# Altium PCB pcb.PcbDoc (part 1 of 3)
Units mm, origin at the board's own origin, x right, y up, seen from the top; angles counter-clockwise.
Board outline 134 x 85 mm, 2 copper layers (Top Layer, Bottom Layer), stack 1.576 mm thick; 95 components, 38 nets, 258 pads, 1810 vias.
Unrouted connection lines stored in the file: 41.
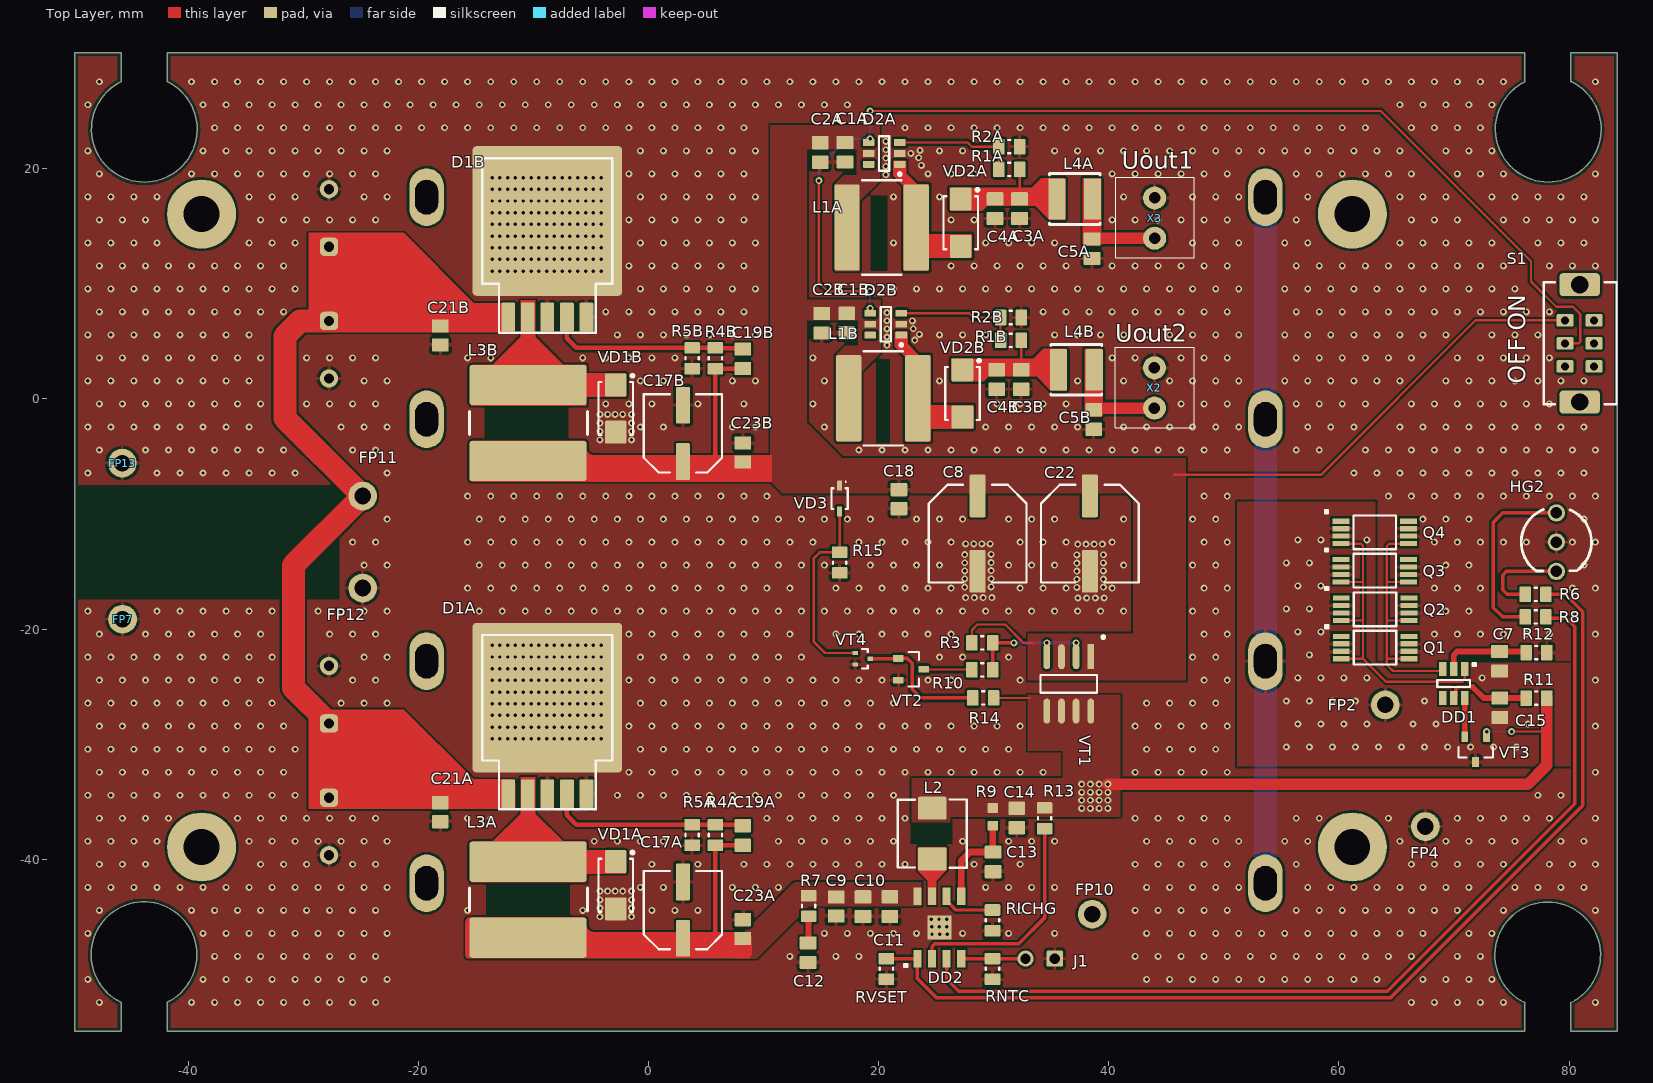
[diagram p0: Top Layer view]
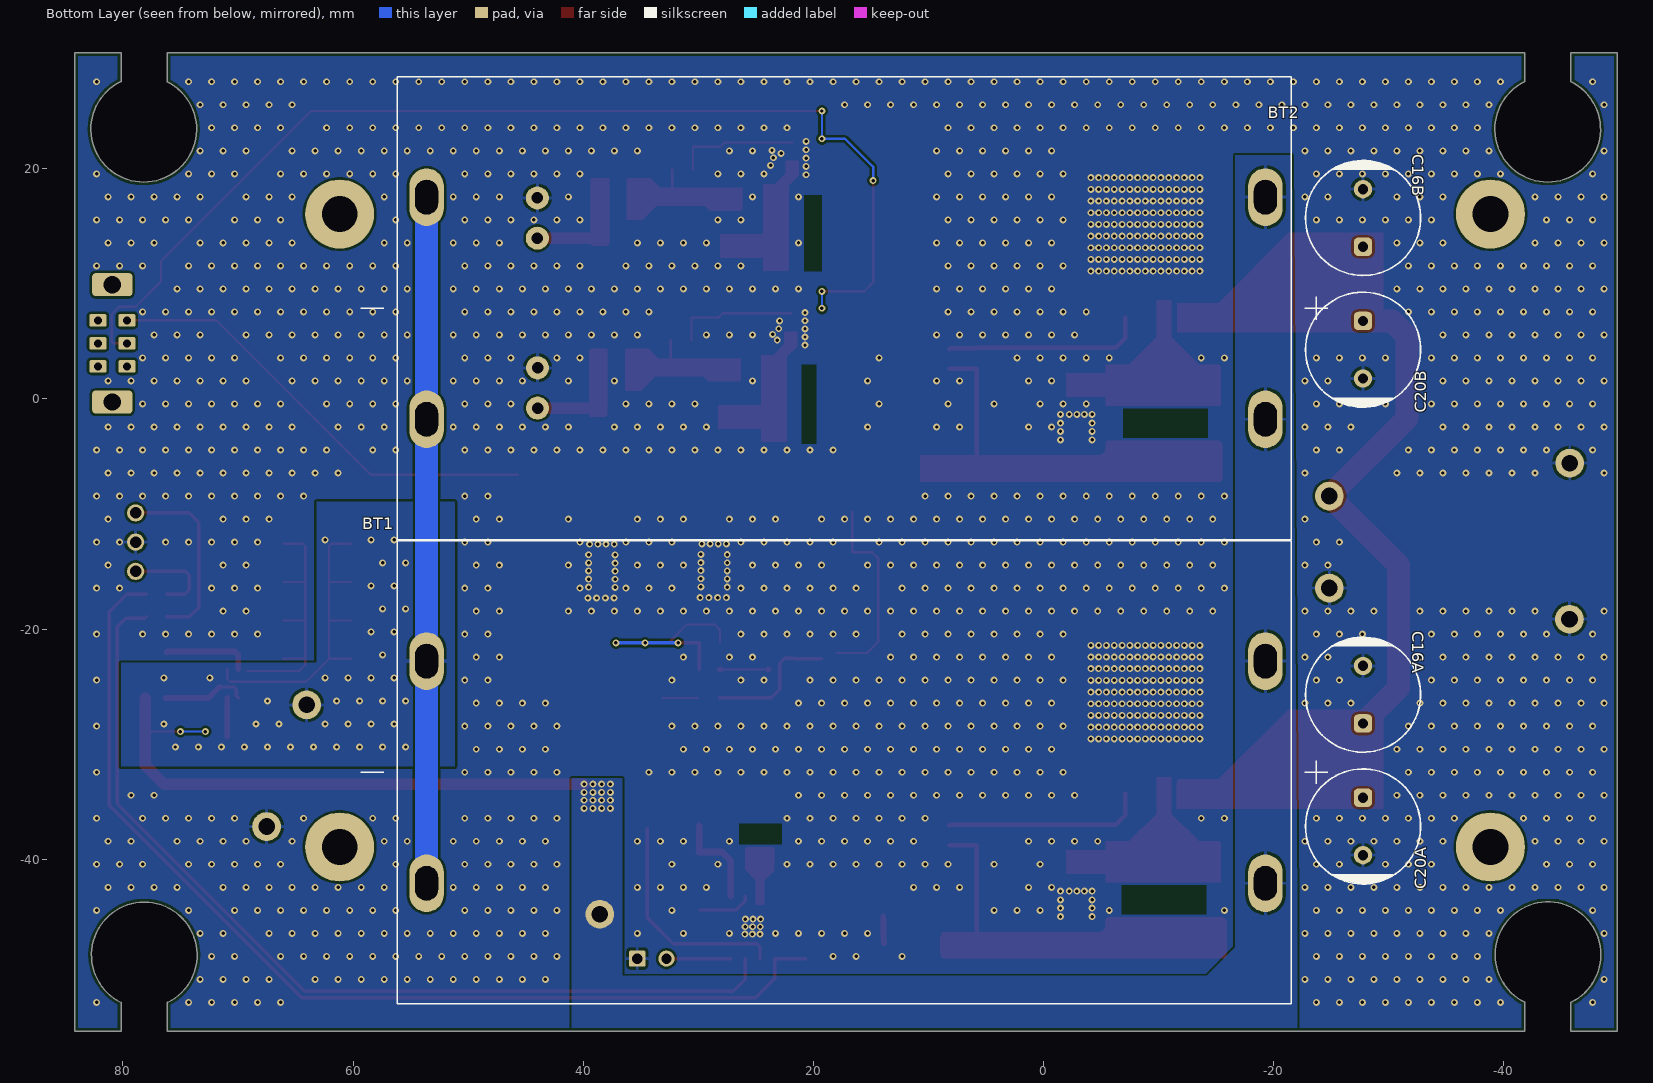
[diagram p1: Bottom Layer view, seen from below]
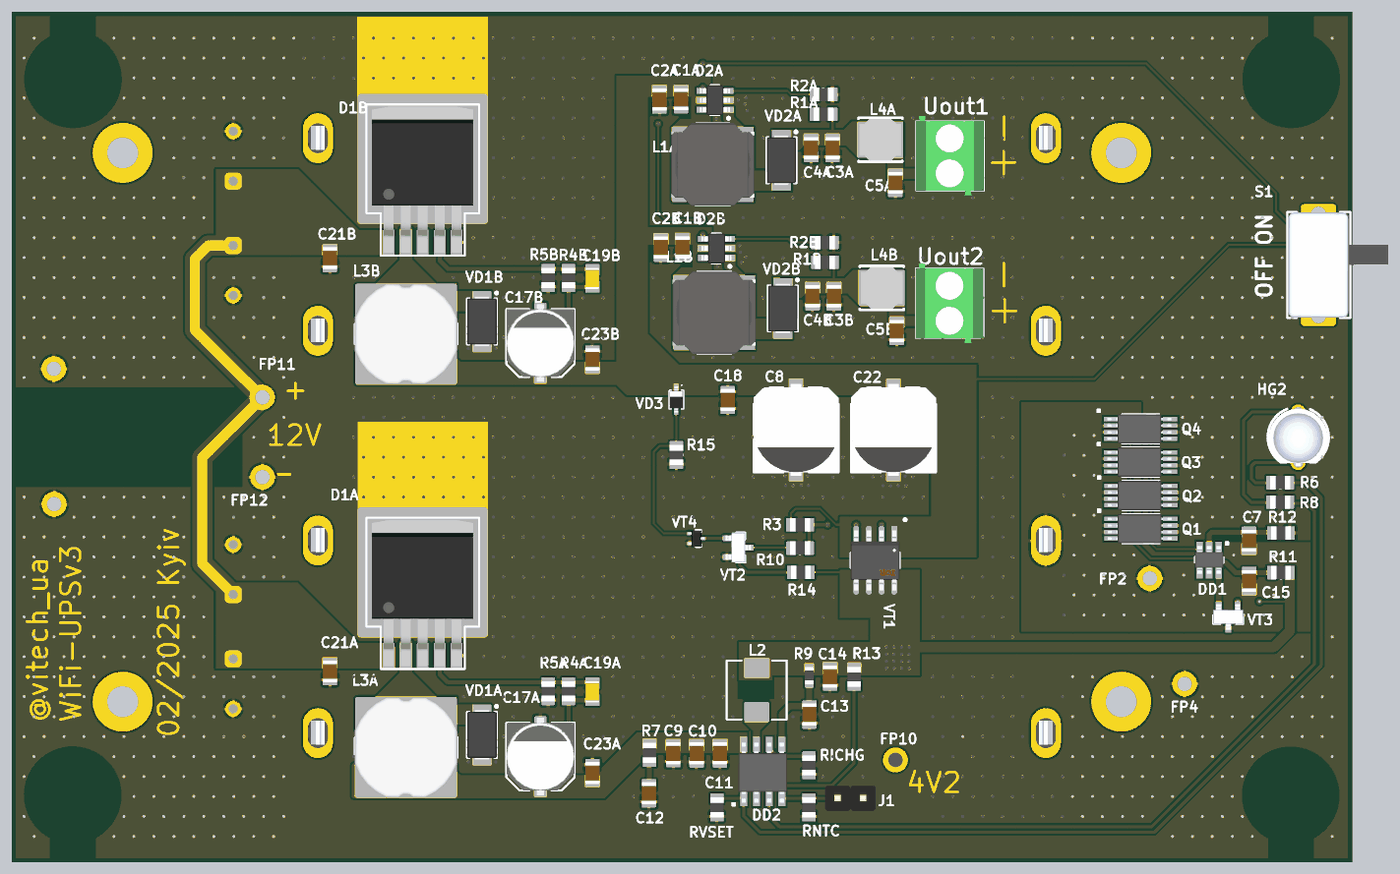
[diagram p3: 3D render of the assembled board from above, using the file's embedded part models]
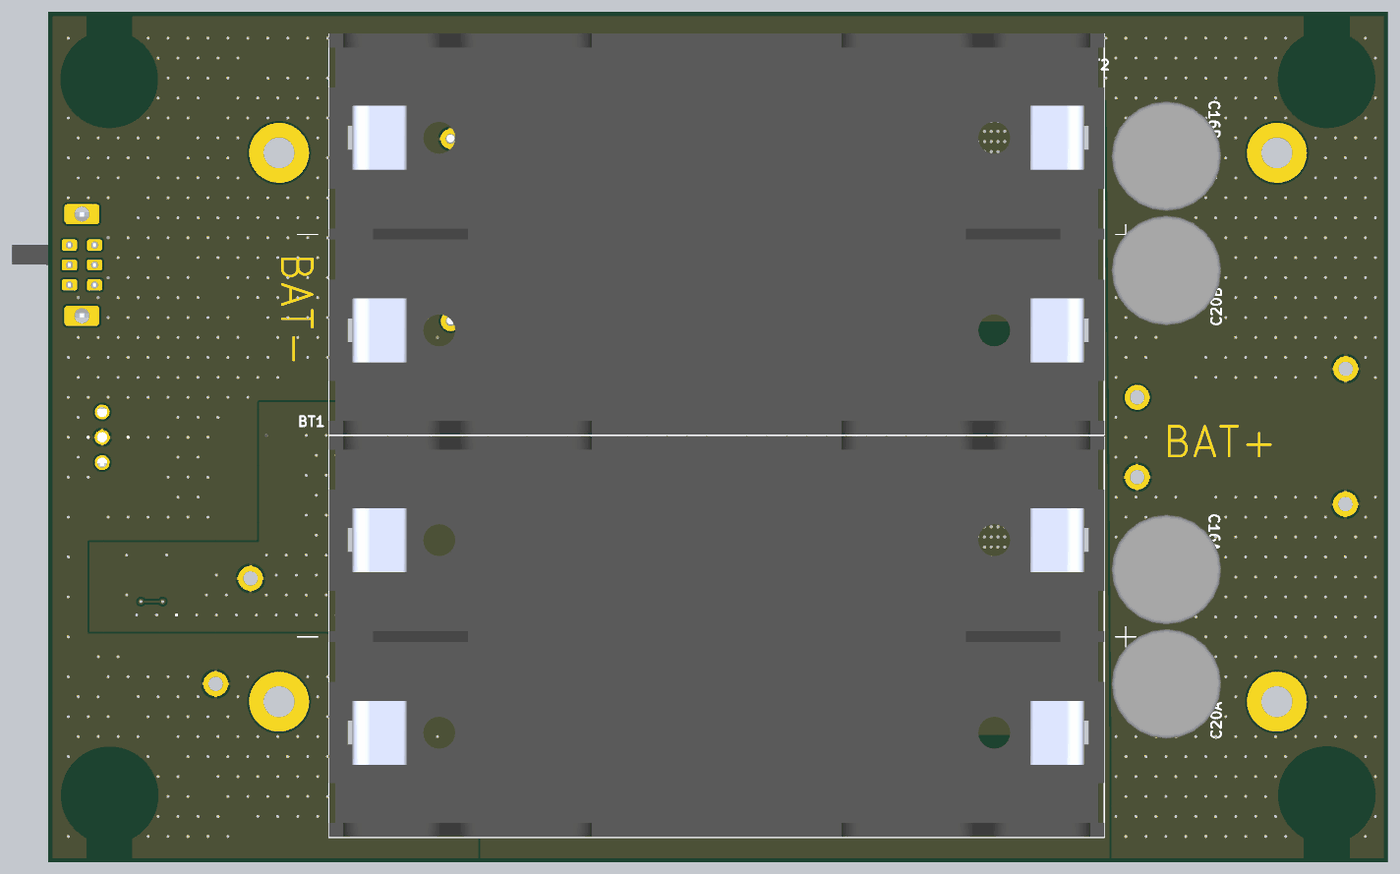
[diagram p4: 3D render of the assembled board from below, using the file's embedded part models]

## Layer stack, top to bottom
Top Solder: solder mask 0.012, Solder Resist, Dk 3.5
Top Layer: signal copper 0.038
Dielectric 1: dielectric 1.5, FR-4, Dk 4.8
Bottom Layer: signal copper 0.038
Bottom Solder: solder mask 0.012, Solder Resist, Dk 3.5

## Board outline
-49.835,-54.94 -45.835,-54.94 -45.835,-52.44 cw(c-43.835,-48.304) -41.835,-52.44 -41.835,-54.94 76.165,-54.94 76.165,-52.44 76.116,-52.451 cw(c78.141,-48.327) 80.165,-52.451 80.165,-54.94 84.165,-54.94 84.165,30.06 80.165,30.06 80.165,27.559 80.215,27.559 cw(c78.19,23.435) 76.165,27.559 76.165,30.06 -41.835,30.06 -41.835,27.559 -41.786,27.559 cw(c-43.81,23.435) -45.835,27.559 -45.835,30.06 -49.835,30.06

## Design rules (kind name [scope] priority, off if disabled: settings)
BoardOutlineClearance [All] p1: gap=0.3 ignorepadtopadclearanceinfootprint=FALSE except(0: Track-OutlineEdge)
Clearance MiddleVoltage [InNetClass('MiddleVoltage')] p1: gap=0.5 ignorepadtopadclearanceinfootprint=FALSE except(0: Arc-Hole Track-Hole SMDPad-Hole THPad-Hole Via-Hole Fill-Hole Poly-Hole Region-Hole Text-Hole; 0.2: Arc-Text Track-Text SMDPad-Text THPad-Text Via-Text Fill-Text Poly-Text Region-Text Text-Text)
Clearance HighVoltage [InNetClass('HighVoltage')] p2: gap=1 ignorepadtopadclearanceinfootprint=FALSE except(0: Arc-Hole Track-Hole SMDPad-Hole THPad-Hole Via-Hole Fill-Hole Poly-Hole Region-Hole Text-Hole; 0.2: Arc-Text Track-Text SMDPad-Text THPad-Text Via-Text Fill-Text Poly-Text Region-Text Text-Text)
Clearance Standart [All] p3: gap=0.2 ignorepadtopadclearanceinfootprint=FALSE except(0: Arc-Hole Track-Hole SMDPad-Hole THPad-Hole Via-Hole Fill-Hole Poly-Hole Region-Hole Text-Hole)
ComponentClearance [All] p1: gap=0.1 collisioncheckmode=3 verticalgap=0.1 showdistances=TRUE
Height [All] p1: minheight=0 maxheight=40 prefheight=12.7
HoleSize [All] p1: absolutevalues=TRUE maxlimit=12 minlimit=0.3 maxpercent=80.000 minpercent=20.000
HoleToHoleClearance [All] p1: gap=0.3 allowstackedmicrovias=TRUE
MinimumSolderMaskSliver [All] p1: minsoldermaskwidth=0.1
NetAntennae [All] p1: netantennaetolerance=2
PlaneClearance [All] p1: clearance=0.3
PlaneConnect PlaneConnectMiddleCurrent [InNetClass('MiddleCurrent')] p1: planeconnectstyle=Relief reliefexpansion=0.508 reliefentries=4 reliefconductorwidth=0.5 reliefairgap=0.3
PlaneConnect PlaneHighCurrent [InNetClass('HighCurrent')] p2: planeconnectstyle=Relief reliefexpansion=0.508 reliefentries=4 reliefconductorwidth=0.5 reliefairgap=0.35
PlaneConnect [All] p3: planeconnectstyle=Relief reliefexpansion=0.508 reliefentries=4 reliefconductorwidth=0.3 reliefairgap=0.3
PolygonConnect PolygonConnectMiddleCurrent [All vs InNetClass('MiddleCurrent')] p1: connectstyle=Relief reliefconductorwidth=0.4 reliefentries=4 polygonreliefangle="90 Angle" airgapwidth=0.3
PolygonConnect PolygonHighCurrent [InNetClass('HighCurrent')] p2: connectstyle=Relief reliefconductorwidth=0.5 reliefentries=4 polygonreliefangle="90 Angle" airgapwidth=0.3
PolygonConnect PolygonConnect_Keepout [(ObjectKind = 'Track') And (Layer = 'KeepOutLayer')] p3: connectstyle=Direct reliefconductorwidth=0.254 reliefentries=4 polygonreliefangle="90 Angle" airgapwidth=0.254
PolygonConnect PolygonConnect_Via [IsVia] p4: connectstyle=Direct reliefconductorwidth=0.254 reliefentries=4 polygonreliefangle="90 Angle" airgapwidth=0.254
PolygonConnect [All] p5: thpad.connectstyle=Relief thpad.reliefconductorwidth=0.3 thpad.reliefentries=4 thpad.polygonreliefangle="90 Angle" thpad.airgapwidth=0.25 smdpad.connectstyle=Relief smdpad.reliefconductorwidth=0.3 smdpad.reliefentries=4 smdpad.polygonreliefangle="90 Angle" smdpad.airgapwidth=0.25 via.connectstyle=Direct via.reliefconductorwidth=0.3 via.reliefentries=4 via.polygonreliefangle="90 Angle" via.airgapwidth=0.3
RoomDefinition STEP_UPA [InComponentClass('STEP_UPA')] p1: confinementstyle=ConfineIn formatcopy=TRUE lockcomponents=FALSE outline 13.703,9.003 40.271,9.003 40.271,23.709 13.703,23.709
RoomDefinition SDB [InComponentClass('SDB')] p2: confinementstyle=ConfineIn formatcopy=TRUE lockcomponents=FALSE outline -33.909,-7.671 9.271,-7.671 9.271,21.819 -33.909,21.819
RoomDefinition SDA [InComponentClass('SDA')] p3: confinementstyle=ConfineIn formatcopy=TRUE lockcomponents=FALSE outline -33.909,-49.098 9.271,-49.098 9.271,-19.609 -33.909,-19.609
RoomDefinition COMUTATOR [InComponentClass('COMUTATOR')] p4: confinementstyle=ConfineIn formatcopy=TRUE lockcomponents=FALSE outline 11.829,-30.175 46.176,-30.175 46.176,-6.02 11.829,-6.02
RoomDefinition STEP_UPB [InComponentClass('STEP_UPB')] p5: confinementstyle=ConfineIn formatcopy=TRUE lockcomponents=FALSE outline 13.843,-5.842 40.411,-5.842 40.411,8.865 13.843,8.865
RoomDefinition charger [InComponentClass('charger')] p6: confinementstyle=ConfineIn formatcopy=TRUE lockcomponents=FALSE outline -887.727,-833.82 -836.927,-833.82 -836.927,-808.42 -887.727,-808.42
RoutingCorners [All] p1: cornerstyle=45-Degree minsetback=1 maxsetback=3
RoutingVias Power [InNetClass('Power')] p1: holewidth=0.8 width=1.5 viastyle="Through Hole" minholewidth=0.5 minwidth=1 maxholewidth=1.2 maxwidth=3
RoutingVias [All] p2: holewidth=0.4 width=0.8 viastyle="Through Hole" minholewidth=0.3 minwidth=0.6 maxholewidth=1 maxwidth=2
SilkToSilkClearance [All] p1: silktosilkclearance=0
SilkToSolderMaskClearance [IsPad] p1: minsilkscreentomaskgap=0.05 clearancetoexposedcopper=TRUE
SolderMaskExpansion SolderMaskExpansion_VIA [IsVia] p1: expansion=-3 istentingtop=TRUE useseparateexpansions=TRUE expansionbottom=-3 istentingbottom=TRUE
SolderMaskExpansion [All] p2: expansion=0.05 istentingtop=FALSE
SupplyNets "Schematic Supply Nets" [InNet('STEP_UP_IN')] p1: voltage=0.000
SupplyNets "Schematic Supply Nets_4" [InNet('GND')] p2: voltage=0.000
SupplyNets "Schematic Supply Nets_5" [InNet('+4V2_BAT')] p3: voltage=0.000
SupplyNets "Schematic Supply Nets_3" [InNet('BGND')] p4: voltage=0.000
SupplyNets "Schematic Supply Nets_2" [InNet('12V_EXT')] p5: voltage=0.000
Width Width_ANT [InNetClass('Anthenna')] p1: maxlimit=1.641 minlimit=0.2 preferedwidth=1.641
Width WidthMiddleCurrent [InNetClass('MiddleCurrent')] p2: maxlimit=2 minlimit=0.35 preferedwidth=0.5
Width WidthHighCurrent [InNetClass('HighCurrent')] p3: maxlimit=5 minlimit=0.5 preferedwidth=1
Width [All] p4: maxlimit=2 minlimit=0.2 preferedwidth=0.5
19 further rules are at their usual default settings.

## Classes and differential pairs
channel class STEP-UP: STEP_UPA STEP_UPB
component class Designator: FP7 FP11 FP12 FP13
component class pROTECTOR: BT1 BT2 C7 C15 DD1 FP2 FP4 Q1 Q2 Q3 Q4 R11 R12 VT3
component class STEP_UPB: C1B C2B C3B C4B C5B D2B L1B L4B R1B R2B VD2B
component class STEP_UPA: C1A C2A C3A C4A C5A D2A L1A L4A R1A R2A VD2A
component class SDA: C16A C17A C19A C20A C21A C23A D1A L3A R4A R5A VD1A
channel class StepDown_LM2596: SDA SDB
component class main: S1 X2 X3
component class charger: C9 C10 C11 C12 C13 C14 DD2 FP10 HG2 J1 L2 R6 R7 R8 R9 R13 RICHG RNTC RVSET
component class SDB: C16B C17B C19B C20B C21B C23B D1B L3B R4B R5B VD1B
component class COMUTATOR: C8 C18 C22 R3 R10 R14 R15 VD3 VT1 VT2 VT4

## Components (designator, comment, footprint, x,y, rotation, side; value= is the part's Value field where it differs from the comment)
BT1 "18650 Holder 2pcs" BAT_BK-18650-PC4 17.315,-32.44 r0 bottom locked
BT2 "18650 Holder 2pcs" BAT_BK-18650-PC4 17.315,7.88 r0 bottom locked
C1A "22uF" CAP-0805(2012)X125T20 17.081,21.435 r270 top (schematic designator C1)
C1B "22uF" CAP-0805(2012)X125T20 17.221,6.59 r270 top (schematic designator C1)
C2A "0.1uF" CAP-0805(2012)X85T10 14.922,21.41 r270 top (schematic designator C2)
C2B "0.1uF" CAP-0805(2012)X85T10 15.062,6.565 r270 top (schematic designator C2)
C3A "0.1uF" CAP-0805(2012)X85T10 32.245,16.533 r270 top (schematic designator C3)
C3B "0.1uF" CAP-0805(2012)X85T10 32.385,1.688 r270 top (schematic designator C3)
C4A "22uF" CAP-0805(2012)X125T20 30.111,16.533 r270 top (schematic designator C4)
C4B "22uF" CAP-0805(2012)X125T20 30.251,1.688 r270 top (schematic designator C4)
C5A "0.1uF" CAP-0805(2012)X85T10 38.544,13.053 r270 top (schematic designator C5)
C5B "0.1uF" CAP-0805(2012)X85T10 38.684,-1.792 r270 top (schematic designator C5)
C7 "0.1uF" CAP-0805(2012)X85T10 73.96,-22.803 r90 top
C8 "470uFx6.3V" CAP-AE-830x670H30_MED 28.6,-11.709 r270 top value=470uF
C9 "0.1uF" C_CERAMIC_0805_MED 16.306,-44.12 r270 top
C10 "10uF" CAP-0805(2012)X85T10 18.643,-44.12 r270 top
C11 "22uF" CAP-0805(2012)X125T15 20.98,-44.12 r270 top
C12 "10uF" CAP-0805(2012)X125T15 13.868,-48.121 r270 top
C13 "22uF" CAP-0805(2012)X125T15 29.947,-40.234 r270 top
C14 "22uF" CAP-0805(2012)X125T15 32.004,-36.424 r270 top
C15 "0.1uF" CAP-0805(2012)X85T10 73.985,-26.842 r90 top
C16A "470uFx16V" CAP-AE-PTH-100D10x125H15 -27.762,-25.701 r90 bottom value=470uF (schematic designator C16)
C16B "470uFx16V" CAP-AE-PTH-100D10x125H15 -27.762,15.726 r90 bottom value=470uF (schematic designator C16)
C17A "220uFx6.3V" CAP-AE-660x550H20_MED 2.997,-44.425 r90 top value=220uF (schematic designator C17)
C17B "220uFx6.3V" CAP-AE-660x550H20_MED 2.997,-2.997 r90 top value=220uF (schematic designator C17)
C18 "0.1uF" C_CERAMIC_0805_MED 21.768,-8.712 r270 top
C19A "100pF" CAP-0805(2012)X60T10 8.204,-37.947 r270 top (schematic designator C19)
C19B "100pF" CAP-0805(2012)X60T10 8.204,3.481 r270 top (schematic designator C19)
C20A "470uFx16V" CAP-AE-PTH-100D10x125H15 -27.762,-37.153 r270 bottom value=470uF (schematic designator C20)
C20B "470uFx16V" CAP-AE-PTH-100D10x125H15 -27.762,4.274 r270 bottom value=470uF (schematic designator C20)
C21A "0.1uF" C_CERAMIC_0805_MED -18.085,-35.916 r270 top (schematic designator C21)
C21B "0.1uF" C_CERAMIC_0805_MED -18.085,5.512 r270 top (schematic designator C21)
C22 "470uFx6.3V" CAP-AE-830x670H30_MED 38.354,-11.709 r270 top value=470uF
C23A "0.1uF" C_CERAMIC_0805_MED 8.204,-46.076 r90 top (schematic designator C23)
C23B "0.1uF" C_CERAMIC_0805_MED 8.204,-4.648 r90 top (schematic designator C23)
D1A "LM2596S-ADJ" TO-263-5-1 -8.788,-34.316 r0 top (schematic designator D1)
D1B "LM2596S-ADJ" TO-263-5-1 -8.788,7.111 r0 top (schematic designator D1)
D2A "MT3608" MT3608_MED 20.485,21.333 r180 top (schematic designator D2)
D2B "MT3608" MT3608_MED 20.625,6.489 r180 top (schematic designator D2)
DD1 "DW01A-G" DW01A-G 69.972,-24.734 r270 top
DD2 "IP2312" IP2313 25.273,-45.923 r90 top
FP2 "PAD-1.45mm" PAD-1.45mm 64.028,-26.588 r0 top
FP4 "PAD-1.45mm" PAD-1.45mm 67.513,-37.16 r0 top
FP7 "PAD-1.45mm" PAD-1.45mm -45.7,-19.146 r0 top
FP10 "PAD-1.45mm" PAD-1.45mm 38.557,-44.78 r90 top
FP11 "PAD-1.45mm" PAD-1.45mm -24.835,-8.44 r90 top
FP12 "PAD-1.45mm" PAD-1.45mm -24.835,-16.44 r90 top
FP13 "PAD-1.45mm" PAD-1.45mm -45.725,-5.582 r0 top
HG2 "OSRPMC5B31A" OSRPMC5B31A 78.892,-12.446 r90 top
J1 "PLS-2 (Part of PLS-40)" PLS-2 34.036,-48.641 r180 top
L1A "4.7uH" SWPA8040S-Series 20.256,14.895 r0 top (schematic designator L1)
L1B "4.7uH" SWPA8040S-Series 20.396,0.051 r0 top (schematic designator L1)
L2 "2.2uH" BMRA00050530-Series 24.663,-37.77 r90 top
L3A "22uH" SRN1060-Series -10.465,-43.518 r270 top (schematic designator L3)
L3B "22uH" SRN1060-Series -10.465,-2.09 r270 top (schematic designator L3)
L4A "4.7uH" SRN4018-Series_1.8mm 37.045,17.371 r0 top (schematic designator L4)
L4B "4.7uH" SRN4018-Series_1.8mm 37.186,2.526 r0 top (schematic designator L4)
Q1 "FS8205A" FS8205A 63.139,-18.282 r0 top
Q2 "FS8205A" FS8205A 63.139,-21.61 r0 top
Q3 "FS8205A" FS8205A 63.114,-14.929 r0 top
Q4 "FS8205A" FS8205A 63.114,-11.602 r0 top
R1A "68k" R_ANY_CHIP_0805_MED 31.356,19.936 r180 top (schematic designator R1)
R1B "68k" R_ANY_CHIP_0805_MED 31.496,5.092 r180 top (schematic designator R1)
R2A "3.3k" R_ANY_CHIP_0805_MED 31.356,21.918 r0 top (schematic designator R2)
R2B "3.3k" R_ANY_CHIP_0805_MED 31.496,7.073 r0 top (schematic designator R2)
R3 "1k" R_ANY_CHIP_0805_MED 29.007,-21.209 r0 top
R4A "30k" R_ANY_CHIP_0805_MED 5.817,-37.897 r90 top (schematic designator R4)
R4B "30k" R_ANY_CHIP_0805_MED 5.817,3.531 r90 top (schematic designator R4)
R5A "10k" R_ANY_CHIP_0805_MED 3.785,-37.897 r270 top (schematic designator R5)
R5B "10k" R_ANY_CHIP_0805_MED 3.785,3.531 r270 top (schematic designator R5)
R6 "2.2k" R_ANY_CHIP_0805_MED 77.089,-16.993 r0 top
R7 "2" R_ANY_CHIP_0805_MED 13.918,-44.07 r270 top
R8 "2.2k" R_ANY_CHIP_0805_MED 77.089,-18.948 r0 top
R9 "0.51" R_ANY_CHIP_0603_MED 29.921,-36.322 r270 top
R10 "22" R_ANY_CHIP_0805_MED 29.007,-23.546 r180 top
R11 "100" R_ANY_CHIP_0805_MED 77.16,-26.004 r0 top
R12 "1k" R_ANY_CHIP_0805_MED 77.16,-22.041 r180 top
R13 "1k" R_ANY_CHIP_0805_MED 34.417,-36.449 r90 top
R14 "1k" R_ANY_CHIP_0805_MED 29.083,-25.984 r180 top
R15 "1k" R_ANY_CHIP_0805_MED 16.612,-14.224 r270 top
RICHG "NC" R_ANY_CHIP_0805_MED 29.897,-45.314 r90 top
RNTC "53k" R_ANY_CHIP_0805_MED 29.897,-49.53 r90 top
RVSET "NC" R_ANY_CHIP_0805_MED 20.676,-49.53 r90 top
S1 "SK22N13U02-2000" SK22N13U02-2000 80.919,4.826 r90 top
VD1A "SK56A-LTP" SMA_MED -2.845,-42.266 r270 top (schematic designator VD1)
VD1B "SK56A-LTP" SMA_MED -2.845,-0.838 r270 top (schematic designator VD1)
VD2A "SK56A-LTP" SMA_MED 27.139,15.314 r270 top (schematic designator VD2)
VD2B "SK56A-LTP" SMA_MED 27.28,0.469 r270 top (schematic designator VD2)
VD3 "BZX384-A4V7-QX" SOD-323_MED 16.612,-8.661 r270 top
VT1 "IRF9358PBF" FP-PG-DSO-8-IPC_B 36.525,-24.765 r270 top
VT2 "IRLML6344" SOT-23_MED 22.809,-23.495 r180 top
VT3 "2N7002,215" SOT-23_MED 71.882,-30.455 r90 top
VT4 "DTC143ZET1G" SOT-416 18.618,-22.581 r270 top
X2 "DG350-3.5-02P" DG350-3.5-02P-14-00AH 43.967,1.041 r90 top
X3 "DG350-3.5-02P" DG350-3.5-02P-14-00AH 43.985,15.805 r90 top

## Footprints (in the part's own frame and the unit in brackets; to place one, negate y for a bottom-side part, rotate by r counter-clockwise, add the part's x,y. Pads: shape width x height; smd on the part's side, far side on the other; paste and mask are expansions set on the pad)
BAT_BK-18650-PC4 [mm]
  oval 3x5 hole 2 slot 3 at 90 deg: 1+(-36.6,9.65) 1-(36.3,9.65) 2+(-36.6,-9.65) 2-(36.3,-9.65)
  silkscreen extent -42,-20.11 42,20.11, body extent -38.86,-20.14 38.84,20.07, height 22.5
BMRA00050530-Series [mm] "5.4x5.7x2.8mm Shielded Power Inductor"
  rrect15% 2x2.5 smd mask+0.05: 1(-2.2,0) 2(2.2,0)
  silkscreen extent -2.96,-3 2.96,3, body extent -2.95,-2.88 2.95,2.88, height 3
C_CERAMIC_0805_MED [mm] "Chip Capacitor, 2-Leads, Body 2,00x1,25mm, IPC Medium Density"
  rrect15% 1.15x1.45 smd mask+0.05: 1(-0.825,0) 2(0.825,0)
  Top Layer pour cut-out: -0.05,0.65 0.05,0.65 0.05,-0.65 -0.05,-0.65
  body extent -1.1,-0.72 1.1,0.73, height 1.35
CAP-0805(2012)X60T10 [mm] "Chip Capacitor, 2-Leads, Body 2,00x1,25mm, IPC Medium Density"
  rrect15% 1.15x1.45 smd mask+0.05: 1(-0.85,0) 2(0.85,0)
  Top Layer pour cut-out: -0.05,0.651 0.05,0.651 0.05,-0.649 -0.05,-0.649
  body extent -1.07,-0.7 1.08,0.7, height 0.7
CAP-0805(2012)X85T10 [mm] "Chip Capacitor, 2-Leads, Body 2,00x1,25mm, IPC Medium Density"
  rrect15% 1.15x1.45 smd mask+0.05: 1(-0.85,0) 2(0.85,0)
  Top Layer pour cut-out: -0.05,0.651 0.05,0.651 0.05,-0.649 -0.05,-0.649
  body extent -1.1,-0.72 1.1,0.73, height 0.95
CAP-0805(2012)X125T15 [mm] "Chip Capacitor, 2-Leads, Body 2,00x1,25mm, IPC Medium Density"
  rrect15% 1.15x1.45 smd mask+0.05: 1(-0.85,0) 2(0.85,0)
  Top Layer pour cut-out: -0.05,0.651 0.05,0.651 0.05,-0.649 -0.05,-0.649
  body extent -1.1,-0.72 1.1,0.73, height 1.4
CAP-0805(2012)X125T20 [mm] "Chip Capacitor, 2-Leads, Body 2,00x1,25mm, IPC Medium Density"
  rrect15% 1.15x1.45 smd mask+0.05: 1(-0.85,0) 2(0.85,0)
  Top Layer pour cut-out: -0.05,0.651 0.05,0.651 0.05,-0.649 -0.05,-0.649
  body extent -1.1,-0.72 1.1,0.73, height 1.45
CAP-AE-660x550H20_MED [mm] "Aluminum Electrolytic Capacitor, Body 6,60x6,60x5,50mm, IPC Medium Density"
  rrect15% 3.2x1.2 smd: 1(-2.45,0) 2(2.45,0)
  silkscreen extent -3.4,-3.4 3.4,3.4, body extent -3.9,-3.4 3.9,3.4, height 5.7
CAP-AE-830x670H30_MED [mm] "Aluminum Electrolytic Capacitor, Body 8.30x8.30x6.70mm, IPC Medium Density"
  rrect15% 3.7x1.4 smd: 1(-3.275,0) 2(3.275,0)
  silkscreen extent -4.25,-4.25 4.25,4.25, body extent -4.6,-4.25 4.6,4.25, height 7.2
CAP-AE-PTH-100D10x125H15 [mm] "PTH Aluminium Electrolytic Capacitor, Diameter 10mm, Height 12.5mm"
  rrect50% 1.6x1.6 hole 0.9: 1(-2.5,0)
  round 1.6 hole 0.9: 2(2.5,0)
  silkscreen extent -5,-5 5,5, body extent -5.5,-5.5 5.5,5.5, height 14
DG350-3.5-02P-14-00AH [mm] "Screw Terminal, Pitch 3,5 mm, 2-Pin, 300V, 7A, Green"
  round 2 hole 1: 1(-1.843,0) 2(1.657,0)
  silkscreen extent -3.54,-3.45 3.45,3.4, body extent -4.05,-3.4 3.95,3.4, height 8.4
DW01A-G [mm]
  rect 1.2x0.65 smd: 1(-1.25,0.95) 2(-1.25,0) 3(-1.25,-0.95) 4(1.25,-0.95) 5(1.25,0) 6(1.25,0.95)
  silkscreen extent -1.78,-1.43 0.3,1.9, body extent -1.4,-1.43 1.4,1.43, height 1.35
FP-PG-DSO-8-IPC_B [mm]
  rect 2.174x0.583 smd paste+0 mask+0: 1(-2.366,1.905)
  rrect100% 2.174x0.583 smd paste+0 mask+0: 2(-2.366,0.635) 3(-2.366,-0.635) 4(-2.366,-1.905) 5(2.366,-1.905) 6(2.366,-0.635) 7(2.366,0.635) 8(2.366,1.905)
  silkscreen extent -4.19,-2.45 0.78,3.12, body extent -3.7,-2.7 3.7,2.7, height 0.25
FS8205A [mm] "Dual N-Channel Enahncement Mode Power MOSFET"
  rect 1.475x0.45 smd: 1(-2.938,0.975) 2(-2.938,0.325) 3(-2.938,-0.325) 4(-2.938,-0.975) 5(2.938,-0.975) 6(2.938,-0.325) 7(2.938,0.325) 8(2.938,0.975)
  silkscreen extent -4.32,-1.47 1.85,1.93, body extent -3.33,-1.47 3.07,1.47, height 1.2
IP2313 [mm] "ESOP-8L DC-DC Converters RoHS"
  rect 1.525x0.7 smd: 1(-2.712,1.905) 2(-2.712,0.635) 3(-2.712,-0.635) 4(-2.712,-1.905) 5(2.712,-1.905) 6(2.712,-0.635) 7(2.712,0.635) 8(2.712,1.905)
  rect 2.083x2.083 smd: 9(0,0)
  silkscreen extent -3.43,2.79 -3.18,3.05, body extent -3.13,-2.45 2.87,2.45, height 1.65
MT3608_MED [mm] "SOT23, 6-Leads, Body 2,90x2,80mm, Pitch 0,95mm, IPC Medium Density"
  rrect15% 1x0.6 smd: 1(-1.35,0.95) 2(-1.35,0) 3(-1.35,-0.95) 4(1.35,-0.95) 5(1.35,0) 6(1.35,0.95)
  silkscreen extent -1.48,-1.5 0.45,1.92, body extent -1.5,-1.5 1.5,1.5, height 1.45
OSRPMC5B31A [mm]
  round 1.5 hole 1 mask+0.05: A1(-2.54,0) A2(2.54,0) CC(0,0)
  silkscreen extent -2.5,-3.05 2.84,3.05, body extent -2.87,-2.95 2.87,2.95, height 13.7
PAD-1.45mm [mm]
  round 2.5 hole 1.45: 1(0,0)
PLS-2 [mm] "2.54mm 2-pin solder pads"
  rrect15% 1.4x1.4 hole 0.9: 1(-1.27,0)
  round 1.4 hole 0.9: 2(1.27,0)
  body extent -2.54,-1.3 2.54,1.24, height 8.54
R_ANY_CHIP_0603_MED [mm] "Chip Resistor, 2-Leads, Body 1,60x0,80mm, IPC Medium Density"
  rrect15% 0.85x0.9 smd mask+0.05: 1(-0.775,0) 2(0.775,0)
  body extent -0.85,-0.45 0.85,0.45, height 0.55
R_ANY_CHIP_0805_MED [mm] "Chip Resistor, 2-Leads, Body 2,00x1,25mm, IPC Medium Density"
  rrect15% 1x1.35 smd: 1(-0.9,0) 2(0.9,0)
  silkscreen extent -0.1,-0.58 0.1,0.57, body extent -1,-0.67 1,0.68, height 0.6
SK22N13U02-2000 [mm]
  rrect30% 1.1x1.5 hole 0.7: 1(-2,-1.25) 2(0,-1.25) 3(2,-1.25) 4(2,1.27) 5(0,1.27) 6(-2,1.27)
  rrect30% 2x3.5 hole 1.5: 7(-5.1,0) 7(5.1,0)
  silkscreen extent -5.3,-3.2 5.3,3.13, body extent -5.25,-7 5.25,3, height 5
SMA_MED [mm] "Molded Diode, 2-Leads, Body 4,30x2,61mm, IPC Medium Density"
  rrect15% 2x1.9 smd mask+0.05: AN(2.05,0) CA(-2.05,0)
  silkscreen extent -2.97,-1.5 2.3,1.58, body extent -2.52,-1.46 2.52,1.46, height 2.44
SOD-323_MED [mm] "SOD-323, 2-Leads, Body 1,25x2,50mm, IPC Medium Density"
  rrect15% 0.85x0.45 smd paste+0 mask+0.05: AN(1.125,0) CA(-1.125,0)
  silkscreen extent -1.5,-0.7 0.9,0.7, body extent -1.3,-0.67 1.3,0.68, height 1.1
SOT-23_MED [mm] "SOT23, 3-Leads, Body 2,92x2,37mm, Pitch 0,95mm, IPC Medium Density"
  rrect15% 0.9x0.6 smd mask+0.05: 1(1.1,-0.95) 2(1.1,0.95) 3(-1.1,0)
  silkscreen extent -0.7,-1.5 0.2,1.5, body extent -1.27,-1.5 1.28,1.5, height 1.15
SOT-416 [mm]
  rrect15% 0.35x0.5 smd mask+0.05: 1(-0.5,-0.65) 2(0.5,-0.65) 3(0,0.65)
  silkscreen extent -0.85,-0.05 0.85,0.45, body extent -0.8,-0.8 0.8,0.8, height 0.78
SRN1060-Series [mm] "SMD Inductor, SRN Series"
  rrect15% 3.5x10.2 smd: 1(-3.3,0) 2(3.3,0)
  silkscreen extent -1,-5.1 1,5.15, body extent -5.05,-5.15 5.05,5.15, height 6
SRN4018-Series_1.8mm [mm] "Semi-shielded Power Inductors, 4.0x4.0x1.8mm"
  rrect15% 1.5x3.6 smd mask+0.05: 1(-1.55,0) 2(1.55,0)
  silkscreen extent -2.2,-2.2 2.2,2.2, body extent -2.1,-2.1 2.1,2.1, height 1.8
SWPA8040S-Series [mm] "Power Wire Wound Inductor, 2-Leads, Body 8,00x8,00mm, IPC Medium Density"
  rrect15% 2.2x7.5 smd: 1(-3,0) 2(3,0)
  silkscreen extent -1.7,-4.1 1.7,4.1, body extent -4.15,-4.15 4.15,4.15, height 4.2
TO-263-5-1 [mm]
  rrect15% 1.2x2.5 smd mask+0.05: 1(-3.4,0) 2(-1.7,0) 3(0,0) 4(1.7,0) 5(3.4,0)
  rrect5% 13x13 smd mask+0.05: 6(0,8.35)
  silkscreen extent -5.65,-1.35 5.65,13.8, body extent -5.08,-1.07 5.08,13.57, height 4.57

## Part data
BT1 BT2: "Battery Holder (Open) 18650 2 Cell PC Pin", Package=None, Availability=Unavailable, MP=BK-18650-PC4, Price=None
C1A C1B C4A C4B: library part CL21A226MAYNNNE, "22uF 25V X5R ±20% 0805 Ceramic Capacitor RoHS", Dielectric Type=X5R, Manufacturer="Samsung Electro-Mechanics", Package=0805, Supplier Part Number 1=187-CL21A226MAYNNNE, Temperature Range="-55°C ~ 85°C", Tolerance=±20%, Voltage=25V, Ajax_1C_ID=35089, Ajax_1C_PN="22uF 25V X5R 20% 0805 CL21A226MAYNNNE Ceramic Capacitor SMD RoHS", Ajax_1С_Status="Mass Production", Component Status=Released, Component Type=SMD, ComponentLink1Description=Datasheet, ComponentLink1URL=https://eu.mouser.com/datasheet/2/585/MLCC-1837944.pdf, GUID_1C=e78293ef-273d-11ec-ab76-0050569f2651, Part Number=CL21A226MAYNNNE, Part Type="Ceramic / X5R / 0805", Price=0.02, Replacement=NONE, Standard Lead Time="24 Weeks", Supplier 1=Mouser
C2A C2B C3A C3B C5A C5B C7 C15: library part CL21B104KBCNNNC, "100nF 50V X7R ±10% 0805 Ceramic Capacitor RoHS", Dielectric Type=X7R, Manufacturer="Samsung Electro-Mechanics", Package=0805, Supplier Part Number 1=1276-1003-2-ND, Temperature Range="-55°C ~ 125°C", Tolerance=±10%, Voltage=50V, Ajax_1C_ID=1251, Ajax_1C_PN="100nF 50V X7R 10% 0805 CL21B104KBCNNNC Ceramic Capacitor SMD RoHS", Ajax_1С_Status="Mass Production", Component Status=Released, Component Type=SMD, ComponentLink1Description=Datasheet, ComponentLink1URL=https://media.digikey.com/pdf/Data%20Sheets/Samsung%20PDFs/CL_Series_MLCC_ds.pdf, GUID_1C=2c368b99-dd41-11e0-af93-6c626deda1bb, Part Number=CL21B104KBCNNNC, Part Type="Ceramic / X7R / 0805", Price=0,00700031, Replacement=NONE, Standard Lead Time="22 Weeks", Supplier 1=Digi-Key
C8 C22: library part RHA0J471MCN1GS, "470uF 6.3V ±20% Size D D8x6.7mm SMD Low ESR Aluminum Electrolytic Capacitor, 9mOhm, 4.5A Ripple Current, 2000 Hrs @ 105°C", Dielectric Type=NONE, Manufacturer=Nichicon, Package="Size D D8x6.7mm", Supplier Part Number 1=647-RHA0J471MCN1GS, Temperature Range="-55°C ~ 105°C", Tolerance=±20%, Voltage=6.3V, Ajax_1C_ID=47814, Ajax_1C_PN="470uF 6.3V 20% 8x7.6mm RHA0J471MCN1GS Nichicon Aluminium Capacitors", Ajax_1С_Status="Mass Production", Component Status=Released, Component Type=SMD, ComponentLink1Description=Datasheet, ComponentLink1URL=https://eu.mouser.com/datasheet/2/293/e_rhs_rha-2507346.pdf, GUID_1C=ebb9074e-17d1-11ed-a362-005056994834, Part Number=RHA0J471MCN1GS, Part Type=Aluminum, Price=0,23717112, Replacement=NONE, Standard Lead Time="17 Weeks", Supplier 1=Mouser
C9 C18 C21A C21B C23A C23B: library part CL21B104KCFSFNE, "100nF 100V X7R ±10% 0805 Ceramic Capacitor RoHS", Dielectric Type=X7R, Manufacturer="Samsung Electro-Mechanics", Package=0805, Supplier Part Number 1=1276-2923-2-ND, Temperature Range="-55°C ~ 125°C", Tolerance=±10%, Voltage=100V, Ajax_1C_ID=12279, Ajax_1C_PN="100nF 100V X7R 10% 0805 CL21B104KCFSFNE Ceramic Capacitor SMD RoHS", Ajax_1С_Status="Mass Production", Component Status=Released, Component Type=SMD, ComponentLink1Description=Datasheet, ComponentLink1URL=https://media.digikey.com/pdf/Data%20Sheets/Samsung%20PDFs/CL_Series_MLCC_ds.pdf, GUID_1C=e54cb00c-325f-11e8-822c-14dda9d2d04d, Part Number=CL21B104KCFSFNE, Part Type="Ceramic / X7R / 0805", Price=0,0054, Replacement=NONE, Standard Lead Time="22 Weeks", Supplier 1=Digi-Key
C10: library part C2012X5R1E106M085AC, "10uF 25V X5R ±20% 0805 Ceramic Capacitor RoHS", Dielectric Type=X5R, Manufacturer="TDK Corporation", Package=0805, Supplier Part Number 1=445-14388-1-ND, Temperature Range="-55°C ~ 85°C", Tolerance=±20%, Voltage=25V, Ajax_1C_ID=13798, Ajax_1C_PN="10uF 25V X5R 20% 0805 C2012X5R1E106M085AC Ceramic Capacitor SMD RoHS", Ajax_1С_Status="Mass Production", Component Status=Released, Component Type=SMD, ComponentLink1Description=Datasheet, ComponentLink1URL=https://product.tdk.com/info/en/catalog/datasheets/mlcc_commercial_general_en.pdf, GUID_1C=d6f4b954-ba78-11e8-ab45-005056918265, Part Number=C2012X5R1E106M085AC, Part Type="Ceramic / X5R / 0805", Price=0,2673, Replacement=NONE, Standard Lead Time="12 Weeks", Supplier 1=Digi-Key
C11 C13 C14: library part CL21A226MAQNNNE, "22uF 25V X5R ±20% 0805 Ceramic Capacitor RoHS", Dielectric Type=X5R, Manufacturer="Samsung Electro-Mechanics", Package=0805, Supplier Part Number 1=187-CL21A226MAQNNNE, Temperature Range="-55°C ~ 85°C", Tolerance=±20%, Voltage=25V, Ajax_1C_ID=23499, Ajax_1C_PN="22uF 25V X5R 20% 0805 CL21A226MAQNNNE Samsung Ceramic Capacitor SMD RoHS", Ajax_1С_Status="Mass Production", Component Status=Released, Component Type=SMD, ComponentLink1Description=Datasheet, ComponentLink1URL=https://eu.mouser.com/datasheet/2/585/MLCC-1837944.pdf, GUID_1C=5446b6ba-1abc-11eb-ab6d-0050569f2651, Part Number=CL21A226MAQNNNE, Part Type="Ceramic / X5R / 0805", Price=0,038, Replacement=NONE, Standard Lead Time="20 Weeks", Supplier 1=Mouser
C12: library part CL21A106KOQNNNE, "10uF 16V Х5R ±10% 0805 Ceramic Capacitor RoHS", Dielectric Type=X5R, Manufacturer="Samsung Electro-Mechanics", Package=0805, Supplier Part Number 1=1276-1096-2-ND, Temperature Range="-55°C ~ 85°C", Tolerance=±10%, Voltage=16V, Ajax_1C_ID=2350, Ajax_1C_PN="10uF 16V Х5R 10% 0805 CL21A106KOQNNNE Ceramic Capacitor SMD RoHS", Ajax_1С_Status="Mass Production", Component Status=Released, Component Type=SMD, ComponentLink1Description=Datasheet, ComponentLink1URL=https://media.digikey.com/pdf/Data%20Sheets/Samsung%20PDFs/CL_Series_MLCC_ds.pdf, GUID_1C=272845d6-647b-11e2-9b5b-6c626deda1bb, Part Number=CL21A106KOQNNNE, Part Type="Ceramic / X5R / 0805", Price=0,0072, Replacement=NONE, Standard Lead Time="22 Weeks", Supplier 1=Digi-Key
C16A C16B C20A C20B: library part EXR471M16B, "470uF 16V D10x12.5mm Electrolytic Low Impedance", Dielectric Type=NONE, Manufacturer=Hitano, Package=D10x12.5mm, Temperature Range="-40°C ~ 105°C", Tolerance=±20%, Voltage=16V, Ajax_1C_ID=15747, Ajax_1C_PN="470uF 16V 10x12.5mm EXR EXR471M16B-Hitano pcs", Ajax_1С_Status="Mass Production", Component Status=Released, Component Type=PTH, ComponentLink1Description=Datasheet, ComponentLink1URL=https://www.hitano.com.tw/wp-content/uploads/doc/EXR_20200408.pdf, GUID_1C=3364ee07-6280-11e9-ab4f-0050569f2651, Part Number=EXR471M16B, Part Type=Aluminum, Price=0,045, Replacement=NONE, Standard Lead Time=NONE
C17A C17B: library part ELV221M0JRC, "220uF 6.3V ±20% Size C D6.3x5.5mm SMD Electrolytic Capacitor", Dielectric Type=NONE, Manufacturer=Hitano, Package="Size C D6.3x5.5mm", Temperature Range="-40°C ~ 85°C", Tolerance=±20%, Voltage=6.3V, Ajax_1C_ID=8271, Ajax_1C_PN="220uF 6,3V ELV SMD sizeC 6.3x5.5 (ELV221M0JRC)", Ajax_1С_Status="RND Only", Component Status=Released, Component Type=SMD, ComponentLink1Description=Datasheet, ComponentLink1URL=https://www.hitano.com.tw/wp-content/uploads/doc/ELV_20200810.pdf, GUID_1C=5aa8f084-0ddb-11e6-818c-d8cb8a9acc66, Part Number=ELV221M0JRC, Part Type=Aluminum, Price=0,07793566, Replacement=NONE, Standard Lead Time=NONE
C19A C19B: library part CC0805JRNPO0BN101, "100pF 100V C0G, NP0 ±5% 0805 Ceramic Capacitor RoHS", Dielectric Type=C0G/NP0, Manufacturer=Yageo, Package=0805, Supplier Part Number 1=603-CC805JRNPO0BN101, Temperature Range="-55°C ~ 125°C", Tolerance=±5%, Voltage=100V, Ajax_1C_PN=NONE, Ajax_1С_Status="RND Only", Component Status=Released, Component Type=SMD, ComponentLink1Description=Datasheet, ComponentLink1URL=https://eu.mouser.com/datasheet/2/447/UPY_NP0X7R_MV_100_to_630V_24-2604388.pdf, Part Number=CC0805JRNPO0BN101, Part Type="Ceramic / C0G(NP0) / 0805", Price=NONE, Replacement=NONE, Standard Lead Time="14 Weeks", Supplier 1=Mouser
D1A D1B: "SIMPLE SWITCHER Power Converter 150-kHz 3-A Step-Down Voltage Regulator", Manufacturer="Texas Instruments", Package=TO-263, Supplier Part Number 1=926-LM2596S-ADJ/NOPB, Temperature Range="-40°C ~ 125°C", Ajax_1C_ID=5535, Ajax_1C_PN="LM2596S-ADJ 150 kHz 3A Step-Down Voltage Regulator", Ajax_1С_Status="Mass Production", Component Status=Released, Component Type=SMD, ComponentLink1Description=Datasheet, ComponentLink1URL=http://www.ti.com/lit/ds/symlink/lm2596.pdf, GUID_1C=db77318d-6bf0-11e4-9c1d-a45d36c4a9e5, Part Number=LM2596S-ADJ, Part Type="Power / DC-DC / Buck", Price=0,44526902, Replacement=NONE, Standard Lead Time="6 Weeks", Supplier 1=Mouser
D2A D2B: "2V-24V Input High Efficiency 1.2MHz 2A Step Up Converter", Manufacturer=Aerosemi, Package=SOT-23-6, Temperature Range="-40°C ~ 85°C", Ajax_1C_ID=8101, Ajax_1C_PN="MT3608 Aerosemi 2A Step Up Converter IC SOT-23-6", Ajax_1С_Status="Mass Production", Component Status=Released, Component Type=SMD, ComponentLink1Description=Datasheet, ComponentLink1URL=https://www.olimex.com/Products/Breadboarding/BB-PWR-3608/resources/MT3608.pdf, GUID_1C=8b925ac5-fc04-11e5-817b-d8cb8a9acc66, Lifecycle="Not Recommended", Part Number=MT3608, Part Type="Power / DC-DC / Boost", Price=0,12, Replacement=NONE, Standard Lead Time=NONE
DD1: "One Cell Lithium-ion/Polymer Battery Protection IC"
FP2 FP4 FP7 FP10 FP11 FP12 FP13: "1.45mm Pad for Plug-In or Receptacle", Manufacturer=NONE, Ajax_1C_PN=NONE, Ajax_1С_Status="RND Only", Component Status=Released, Component Type=PTH, ComponentLink1Description=Datasheet, ComponentLink1URL=NONE, Part Number=PAD-1.45mm, Part Type=Pad, Price=NONE, Replacement=NONE, Temperature Range=NONE
HG2: "5mm Phoenix Red & Pure Green LED, 625nm and 525nm, 30°", Color="Red, Green", Manufacturer=OptoSupply, Package=5mm, Temperature Range="-30°C ~ 85°C", Ajax_1C_ID=42089, Ajax_1C_PN="OSRPMC5B31A F5  RED/GREEN 3.3V  Common Cathode", Ajax_1С_Status="RND Only", Component Status="On Review", Component Type=PTH, ComponentLink1Description=Datasheet, ComponentLink1URL=\\altiumdb.ajax.local\files\Datasheet\Opto\OSRPMC5B31A.pdf, GUID_1C=10faf48a-c158-11ec-a35b-005056994834, Part Number=OSRPMC5B31A, Part Type="LED / 5mm", Price=0,125, Replacement=NONE, Wavelength="625nm, 525nm"
J1: library part DS1021-02SF11, "2 Pin 2.54mm Male Header, Vertical, 3mm and 6.1mm, PLS-2", Manufacturer=Connfly, Temperature Range="-40°C ~ 105°C", Ajax_1C_ID=1215, Ajax_1C_PN="PLS40, планки со штырьками", Ajax_1С_Status="Mass Production", Component Status=Released, Component Type=PTH, ComponentLink1Description=Datasheet, ComponentLink1URL=\\altiumdb.ajax.local\files\Datasheet\Connectors\DS1021.pdf, GUID_1C=10be163c-dd40-11e0-af93-6c626deda1bb, Part Number=DS1021-02SF11, Part Type="Header / Male Pin / Single Row", Price=0,001875, Replacement=NONE
L1A L1B: library part SWPA8040S4R7NT, "4.7uH Magnetic-Resin Shielded Wirewound Inductor 4.1 A 25mOhm Max", Current=4.1A, Manufacturer="Shenzhen Sunlord Electronics", Package=8.0x8.0x4.0mm, Saturation Current=5.9A, Supplier Part Number 1=3442-SWPA8040S4R7NTTR-ND, Temperature Range="-40°C ~ 125°C", Tolerance=±30%, Ajax_1C_ID=85672, Ajax_1C_PN="4.7uH 30% 4.1A 25mOhm Max SWPA8040S4R7NT SMD Power Inductor", Ajax_1С_Status="RND Only", Component Status=Released, Component Type=SMD, ComponentLink1Description=Datasheet, ComponentLink1URL=\\altiumdb.ajax.local\files\Datasheet\Inductors\SWPA_Series_of_SMD_Power_Inductor.pdf, GUID_1C=9a5367f7-7c8d-11ee-a921-00505699469b, Part Number=SWPA8040S4R7NT, Part Type="Power / Ferrite Core", Price=0,83075, Replacement=NONE, Standard Lead Time="16 Weeks", Supplier 1=Digi-Key
L2: library part BMRA000505302R2MA1, "2.2uH 5A 35mOhm max Closed Magnetic, Molding Processing, Ultra High Current Power Inductor", Current=5A, Manufacturer=Chilisin, Package=5.4x5.7x2.8mm, Saturation Current=8A, Supplier Part Number 1=553-BMRA000505302R2MA1TR-ND, Temperature Range="-55°C ~ 125°C", Tolerance=±20%, Ajax_1C_ID=84493, Ajax_1C_PN="2.2uH 20% 5A 5.7x5.4mm BMRA000505302R2MA1 Chilisin Electronics", Ajax_1С_Status="RND Only", Component Status=Released, Component Type=SMD, ComponentLink1Description=Datasheet, ComponentLink1URL=https://eu.mouser.com/datasheet/2/447/BMRx_Series-2943964.pdf, GUID_1C=5ef22b21-6e83-11ee-a91e-00505699469b, Part Number=BMRA000505302R2MA1, Part Type="Power / Wirewound", Price=0,7, Replacement=NONE, Supplier 1=Digi-Key
L3A L3B: library part SRN1060-220M, "22uH Semi-Shielded Wirewound Inductor 3.4A 53mOhm Max", Current=3.4A, Manufacturer="Bourns Inc", Package=10x9.8mm, Supplier Part Number 1=SRN1060-220MTR-ND, Temperature Range="-40°C ~ 125°C", Tolerance=±20%, Ajax_1C_ID=13643, Ajax_1C_PN="22uH SRN1060-220M SMD inductor", Ajax_1С_Status="Mass Production", Component Status=Released, Component Type=SMD, ComponentLink1Description=Datasheet, ComponentLink1URL=https://www.bourns.com/docs/Product-Datasheets/SRN1060.pdf, GUID_1C=57004023-b026-11e8-ab45-005056918265, Part Number=SRN1060-220M, Part Type="Power / Ferrite Core", Price=0,2134301, Replacement=NONE, Saturation Current=3.4A, Standard Lead Time="20 Weeks", Supplier 1=Digi-Key
L4A L4B: library part SRN4018-4R7M, "4.7uH Semi-Shielded Wirewound Inductor 1.9A 84mOhm Max", Current=1.9A, Manufacturer="Bourns Inc", Package=4.0x4.0x1.8mm, Saturation Current=2A, Supplier Part Number 1=652-SRN4018-4R7M, Temperature Range="-25°C ~ 120°C", Tolerance=±20%, Ajax_1C_ID=20972, Ajax_1C_PN="4.7uH SRN4018-4R7M SMD Индуктивность", Ajax_1С_Status="Mass Production", Component Status=Released, Component Type=SMD, ComponentLink1Description=Datasheet, ComponentLink1URL=https://eu.mouser.com/datasheet/2/54/srn4018-1391320.pdf, GUID_1C=7ba8f5fd-b629-11ea-ab61-0050569f2651, Part Number=SRN4018-4R7M, Part Type="Power / Ferrite Core", Price=0.09851659, Replacement=NONE, Standard Lead Time="42 Weeks", Supplier 1=Mouser
Q1 Q2 Q3 Q4: "Dual N-Channel Enahncement Mode Power MOSFET", ComponentLink1Description=Data, ComponentLink1URL=https://www.ic-fortune.com/upload/Download/FS8205A-DS-12_EN.pdf, Datasheet=https://www.ic-fortune.com/upload/Download/FS8205A-DS-12_EN.pdf
R1A R1B: library part RC0805JR-072K2L, "2.2 kOhms ±5% 1/8W 0805 Thick Film Resistor", Manufacturer=Yageo, Package=0805, Power Rating=0.125W, Supplier Part Number 1=311-2.2KARTR-ND, Temperature Range="-55°C ~ 155°C", Temperature Stability=±100ppm/°C, Tolerance=±5%, Voltage=150V, Ajax_1C_ID=26119, Ajax_1C_PN="2.2k 5% 0805 Resistors SMD RoHS", Ajax_1С_Status="RND Only", Component Status=Released, Component Type=SMD, ComponentLink1Description=Datasheet, ComponentLink1URL=https://eu.mouser.com/datasheet/2/447/PYu_RC_Group_51_RoHS_L_11-1984063.pdf, GUID_1C=80325ec8-617a-11eb-ab6f-0050569f2651, Part Number=RC0805JR-072K2L, Part Type="Thick Film", Price=0,005, Replacement=NONE, Supplier 1=Digi-Key
R2A R2B: library part RC0805JR-073K3L, "3.3 kOhms ±5%, 1/8W 0805 Thick Film Resistor", Manufacturer=Yageo, Package=0805, Power Rating=0.125W, Temperature Range="-55°C ~ 155°C", Temperature Stability=±100ppm/°C, Tolerance=±5%, Voltage=150V, Ajax_1C_ID=9030, Ajax_1C_PN="3.3k 5% 0805 Resistors SMD RoHS", Ajax_1С_Status="RND Only", Component Status=Released, Component Type=SMD, ComponentLink1Description=Datasheet, ComponentLink1URL=https://eu.mouser.com/datasheet/2/447/PYu_RC_Group_51_RoHS_L_10-1664068.pdf, GUID_1C=cb9785ec-9b47-11e6-8242-d8cb8a9acc66, Part Number=RC0805JR-073K3L, Part Type="Thick Film", Price=0,001081, Replacement=NONE
R3 R6 R8 R14 R15: library part RC0805FR-072K2L, "2.2 kOhms ±1% 1/8W 0805 Thick Film Resistor", Manufacturer=Yageo, Package=0805, Power Rating=0.125W, Supplier Part Number 1=603-RC0805FR-072K2L, Temperature Range="-55°C ~ 155°C", Temperature Stability=±100ppm/°C, Tolerance=±1%, Voltage=150V, Ajax_1C_ID=30906, Ajax_1C_PN="2.2k 1% 0805 Resistors SMD RoHS", Ajax_1С_Status="RND Only", Component Status=Released, Component Type=SMD, ComponentLink1Description=Datasheet, ComponentLink1URL=https://eu.mouser.com/datasheet/2/447/YAGEO_PYu_RC_Group_51_RoHS_L_12-3313492.pdf, GUID_1C=690422a9-c9eb-11eb-ab74-0050569f2651, Part Number=RC0805FR-072K2L, Part Type="Thick Film", Price=0.0014, Replacement=NONE, Supplier 1=Mouser
R4A R4B: library part RC0805FR-0730KL, "30 kOhms ±1%, 1/8W 0805 Thick Film Resistor", Manufacturer=Yageo, Package=0805, Power Rating=0.125W, Supplier Part Number 1=311-30.0KCRTR-ND, Temperature Range="-55°C ~ 155°C", Temperature Stability=±100ppm/°C, Tolerance=±1%, Voltage=150V, Ajax_1C_ID=9642, Ajax_1C_PN="30k 1% 0805 Resistors SMD RoHS", Ajax_1С_Status="Mass Production", Component Status=Released, Component Type=SMD, ComponentLink1Description=Datasheet, ComponentLink1URL=https://eu.mouser.com/datasheet/2/447/PYu_RC_Group_51_RoHS_L_10-1664068.pdf, GUID_1C=71e2aa09-07e0-11e7-82d0-d8cb8a9acc66, Part Number=RC0805FR-0730KL, Part Type="Thick Film", Price=0,001, Replacement=NONE, Supplier 1=Digi-Key
R5A R5B: library part RC0805FR-0710K2L, "10 kOhms ±1%, 1/8W 0805 Thick Film Resistor", Manufacturer=Yageo, Package=0805, Power Rating=0.125W, Supplier Part Number 1=311-10.2KCRTR-ND, Temperature Range="-55°C ~ 155°C", Temperature Stability=±100ppm/°C, Tolerance=±1%, Voltage=150V, Ajax_1C_ID=13943, Ajax_1C_PN="10.2k 1% 0805 Resistors SMD RoHS", Ajax_1С_Status="Mass Production", Component Status=Released, Component Type=SMD, ComponentLink1Description=Datasheet, ComponentLink1URL=https://eu.mouser.com/datasheet/2/447/PYu_RC_Group_51_RoHS_L_10-1664068.pdf, GUID_1C=8bc9d0ce-c58a-11e8-ab47-0050569f2651, Part Number=RC0805FR-0710K2L, Part Type="Thick Film", Price=0,0014, Replacement=NONE, Supplier 1=Digi-Key
R7: library part RC0805FR-072RL, "2 Ohm ±1%, 1/8W 0805 Thick Film Resistor", Manufacturer=Yageo, Package=0805, Power Rating=0.125W, Supplier Part Number 1=603-RC0805FR-072RL, Temperature Range="-55°C ~ 155°C", Temperature Stability=±200ppm/°C, Tolerance=±1%, Voltage=150V, Ajax_1C_ID=9244, Ajax_1C_PN="2R 1% 0805  Resistors SMD RoHS", Ajax_1С_Status="RND Only", Component Status=Released, Component Type=SMD, ComponentLink1Description=Datasheet, ComponentLink1URL=https://eu.mouser.com/datasheet/2/447/PYu_RC_Group_51_RoHS_L_10-1664068.pdf, GUID_1C=2cef56fd-bde9-11e6-826e-d8cb8a9acc66, Part Number=RC0805FR-072RL, Part Type="Thick Film", Price=0,09, Replacement=NONE, Supplier 1=Mouser
R9: library part RL0603FR-070R51L, "510 mOhms ±1%, 1/10W 0603 Thick Film Resistor", Manufacturer=Yageo, Package=0603, Power Rating=0.1W, Supplier Part Number 1=311-.51QTR-ND, Temperature Range="-55°C ~ 155°C", Temperature Stability=±300ppm/°C, Tolerance=±1%, Voltage=NONE, Ajax_1C_ID=15962, Ajax_1C_PN="0.51R 1% 0603 Resistors SMD RoHS", Ajax_1С_Status="RND Only", Component Status=Released, Component Type=SMD, ComponentLink1Description=Datasheet, ComponentLink1URL=https://www.yageo.com/upload/media/product/productsearch/datasheet/rchip/PYu-RL_Group_521_RoHS_L_2.pdf, GUID_1C=c10a41ba-7620-11e9-ab53-0050569f2651, Part Number=RL0603FR-070R51L, Part Type="Thick Film", Price=0,04488, Replacement=NONE, Supplier 1=Digi-Key
R10: library part RC0805JR-0722RL, "22 Ohms ±5%, 1/8W 0805 Thick Film Resistor", Manufacturer=Yageo, Package=0805, Power Rating=0.125W, Temperature Range="-55°C ~ 155°C", Temperature Stability=±100ppm/°C, Tolerance=±5%, Voltage=150V, Ajax_1C_ID=8822, Ajax_1C_PN="22R 5% 0805 Resistors SMD RoHS", Ajax_1С_Status="Mass Production", Component Status=Released, Component Type=SMD, ComponentLink1Description=Datasheet, ComponentLink1URL=https://eu.mouser.com/datasheet/2/447/PYu_RC_Group_51_RoHS_L_10-1664068.pdf, GUID_1C=3ba40fec-5951-11e6-81ec-d8cb8a9acc66, Part Number=RC0805JR-0722RL, Part Type="Thick Film", Price=0.0011, Replacement=NONE
R11: library part RC0805FR-07120RL, "100 Ohms ±1%, 1/8W 0805 Thick Film Resistor", Manufacturer=Yageo, Package=0805, Power Rating=0.125W, Temperature Range="-55°C ~ 155°C", Temperature Stability=±100ppm/°C, Tolerance=±1%, Voltage=150V, Ajax_1C_ID=14156, Ajax_1C_PN="120R 1% 0805 Resistors SMD RoHS", Ajax_1С_Status="Mass Production", Component Status=Released, Component Type=SMD, ComponentLink1Description=Datasheet, ComponentLink1URL=https://eu.mouser.com/datasheet/2/447/PYu_RC_Group_51_RoHS_L_10-1664068.pdf, GUID_1C=b31bb40e-dc54-11e8-ab4a-0050569f2651, Part Number=RC0805FR-07120RL, Part Type="Thick Film", Price=0,0014, Replacement=NONE
R12 R13: library part RC0805FR-071KL, "1 kOhms ±1%, 1/8W 0805 Thick Film Resistor", Manufacturer=Yageo, Package=0805, Power Rating=0.125W, Supplier Part Number 1=311-1.00KCRTR-ND, Temperature Range="-55°C ~ 155°C", Temperature Stability=±100ppm/°C, Tolerance=±1%, Voltage=150V, Ajax_1C_ID=8520, Ajax_1C_PN="1k 1% 0805 Resistors SMD RoHS", Ajax_1С_Status="Mass Production", Component Status=Released, Component Type=SMD, ComponentLink1Description=Datasheet, ComponentLink1URL=https://eu.mouser.com/datasheet/2/447/PYu_RC_Group_51_RoHS_L_10-1664068.pdf, GUID_1C=0c53a8ec-2890-11e6-81ae-d8cb8a9acc66, Part Number=RC0805FR-071KL, Part Type="Thick Film", Price=0,0014, Replacement=NONE, Supplier 1=Digi-Key
RICHG RNTC RVSET: library part RC0805FR-07120RL, Manufacturer=Yageo, Package=0805, Power Rating=0.125W, Temperature Range="-55°C ~ 155°C", Temperature Stability=±100ppm/°C, Tolerance=±1%, Voltage=150V, Ajax_1C_ID=14156, Ajax_1C_PN="120R 1% 0805 Resistors SMD RoHS", Ajax_1С_Status="Mass Production", Component Status=Released, Component Type=SMD, ComponentLink1Description=Datasheet, ComponentLink1URL=https://eu.mouser.com/datasheet/2/447/PYu_RC_Group_51_RoHS_L_10-1664068.pdf, GUID_1C=b31bb40e-dc54-11e8-ab4a-0050569f2651, Part Number=RC0805FR-07120RL, Part Type="Thick Film", Price=0,0014, Replacement=NONE
S1: "DPDT Switch, 10.4х6х5mm, Knob Length 2 mm", Manufacturer="Sun Rise Electronic", Temperature Range=NONE, Ajax_1C_ID=1220, Ajax_1C_PN="SK22N13U02-2000, выключатель", Ajax_1С_Status="Mass Production", Component Status=Released, Component Type=PTH, ComponentLink1Description=Datasheet, ComponentLink1URL=\\altiumdb.ajax.local\files\Datasheet\Electromechanics\SK22N13U.pdf, GUID_1C=10be1646-dd40-11e0-af93-6c626deda1bb, Part Number=SK22N13U02-2000, Part Type=Switch, Price=0.05, Replacement=NONE
VD1A VD1B VD2A VD2B: "Diode Schottky 60V 5A, SMA", Current=5A, Manufacturer="Micro Commercial Components", Package=SMA, Supplier Part Number 1=SK56A-LTPMSTR-ND, Temperature Range="-55°C ~ 150°C", Voltage=60V, Ajax_1C_ID=12747, Ajax_1C_PN="SK56A-LTP диод", Ajax_1С_Status="Mass Production", Component Status=Released, Component Type=SMD, ComponentLink1Description=Datasheet, ComponentLink1URL=https://www.mccsemi.com/pdf/Products/SK52A-L-SK510A-L(DO-214AC).pdf, GUID_1C=b92aa543-5aa4-11e8-ab3c-0050569f2651, Marking=SK56A, Part Number=SK56A-LTP, Part Type=Schottky, Price=0,06, Replacement=NONE, Standard Lead Time="12 Weeks", Supplier 1=Digi-Key, Vf="750mV @ 5A"
VD3: "Zener Diode 4.7V, 300mW, ±1%, Leakage 3uA @ 2V, SOD-323", Manufacturer="Nexperia USA", Package=SOD-323, Supplier Part Number 1=771-BZX384-A4V7-QX, Temperature Range="-65°C ~ 150°C", Voltage=4.7V, Ajax_1C_PN=NONE, Ajax_1С_Status="RND Only", Component Status=Released, Component Type=SMD, ComponentLink1Description=Datasheet, ComponentLink1URL=https://eu.mouser.com/datasheet/2/916/BZX384_Q_SER-2721638.pdf, Marking=22, Part Number=BZX384-A4V7-QX, Part Type=Zener, Price=NONE, Replacement=NONE, Standard Lead Time="4 Weeks", Supplier 1=Mouser
VT1: library part IRF9358PbF, "MOSFET 2P-CH 30V 9.2A 8SOIC", Continuous Drain Current=-9.2A, Drain To Source Breakdown Voltage=-30V, Drain To Source Resistance=19mΩ, Gate To Source Voltage=20V, Input Capacitace At Vds="1740pF @ -25V", Manufacturer="Infineon Technologies", Max Forward Diode Voltage=-1.2V, Max Junction Temp=+150°C, Package=PG-DSO-8, Power Dissipation=2W, Pulse Drain Current=-73A, Temperature="-55°C to +150°C", Temperature Range Low=-55°C, Automotive=No, Category=Trans, ComponentLink2Description=Datasheet, ComponentLink2URL=https://www.infineon.com/dgdl/irf9358pbf.pdf?fileId=5546d462533600a4015356114ffa1da5, Depletion Mode=False, Device Class L1="Discrete Semiconductors", Device Class L2=Transistors, Device Class L3=MOSFETs, Digikey Description="MOSFET 2P-CH 30V 9.2A 8SOIC", Drain To Source Voltage=-30V, Footprint Url=https://www.infineon.com/dgdl/po-so8.pdf?fileId=5546d462580663ef0158068a1275014d, Gate Charge At Vgs="19nC @ -4.5V", Height=1.75mm, Ipc Land Pattern Name=SOIC127P600X155-8, Lead Free=Yes, Manufacturer Part Number=IRF9358PBF, Mouser Description="Dual P-Channel 30 V 16.3 mOhm 19 nC HEXFET® Power Mosfet - SOIC-8", Number Of Channels=2, Number Of P Channels=2, Octopart=https://octopart.com/irf9358pbf-infineon-65873752, Reverse Recovery Charge=35nC, Reverse Recovery Time=55ns, RoHS=TRUE, Rthja Max=62.5°C/W, Standoff Height=0.1mm, Temperature Range High=+150°C, Threshold Vgs Max=-2.4V, Threshold Vgs Min=-1.3V, Transconductance=23S, Turn Off Delay Time=146ns, Turn On Delay Time=5.7ns
VT2: library part IRLML6344TRPBF, "30V, 5A max N-Channel HEXFET MOSFET, 29mOhm @ Vgs = 4.5V", Manufacturer="Infineon Technologies", Package=SOT-23, Supplier Part Number 1=IRLML6344TRPBFTR-ND, Temperature Range="-55°C ~ 150°C", Ajax_1C_ID=9416, Ajax_1C_PN="IRLML6344TRPBF  SOT23. полевой транзистор", Ajax_1С_Status="RND Only", Component Status=Released, Component Type=SMD, ComponentLink1Description=Datasheet, ComponentLink1URL=https://www.infineon.com/dgdl/irlml6344pbf.pdf?fileId=5546d462533600a4015356689c44262c, GUID_1C=8299d48f-df0c-11e6-829c-d8cb8a9acc66, Id=5A, Part Number=IRLML6344TRPBF, Part Type=N-Channel, Price=0.08596562, Rds=37mOhm, Replacement=NONE, Standard Lead Time="16 Weeks", Supplier 1=Digi-Key, Vds=30V
VT3: "60V, 300mA max N-Channel Trench MOSFET, 3.8Ohm @ Vgs = 4.5V", Manufacturer="Nexperia USA", Package=SOT-23, Supplier Part Number 1=1727-2764-2-ND, Temperature Range="-65°C ~ 150°C", Ajax_1C_ID=8875, Ajax_1C_PN="2N7002.215 , NXP полевой транзистор", Ajax_1С_Status="Mass Production", Component Status=Released, Component Type=SMD, ComponentLink1Description=Datasheet, ComponentLink1URL=https://assets.nexperia.com/documents/data-sheet/2N7002.pdf, GUID_1C=4d2e7416-6b97-11e6-8203-d8cb8a9acc66, Id=300mA, Part Number=2N7002,215, Part Type=N-Channel, Price=0.0202, Rds=5.3Ohm, Replacement=NONE, Standard Lead Time="4 Weeks", Supplier 1=Digi-Key, Vds=60V
VT4: "50V, 100mA Low Vce(sat) NPN Digital Transistor, Pre-Biased 4.7k/47k (with built-in resistors)", Manufacturer=Onsemi, Package=SC-75, Supplier Part Number 1=DTC143ZET1GOSTR-ND, Temperature Range="-55°C ~ 150 °C", Ajax_1C_ID=9410, Ajax_1C_PN="DTC143ZET1G SC-75-3  биполярный NPN транзистор", Ajax_1С_Status="Mass Production", Component Status=Released, Component Type=SMD, ComponentLink1Description=Datasheet, ComponentLink1URL=http://www.onsemi.com/pub/Collateral/DTC143Z-D.PDF, GUID_1C=d76ac5d5-de69-11e6-829b-d8cb8a9acc66, Ic=100mA, Part Number=DTC143ZET1G, Part Type=NPN, Price=0.015, Replacement=NONE, Standard Lead Time="8 Weeks", Supplier 1=Digi-Key, Vce=50V
X2 X3: library part DG350-3.5-02P-14-00AH, "Screw Terminal, 3.5mm Pitch, 2 pin, Green", Manufacturer=Degson, Temperature Range="-40°C ~ 105°C", Ajax_1C_ID=21524, Ajax_1C_PN="DG350-3.5-02P-14-00AH, клеммник", Ajax_1С_Status="RND Only", Component Status=Released, Component Type=PTH, ComponentLink1Description=Datasheet, ComponentLink1URL=\\altiumdb.ajax.local\files\Datasheet\Connectors\DG350-3.5,3.96.pdf, GUID_1C=367ff815-d639-11ea-ab63-0050569f2651, Part Number=DG350-3.5-02P-14-00AH, Part Type=Terminal, Price=0,17091154, Replacement=NONE

## Free pads (board coordinates)
  round 6 hole 3.1: 4(-38.835,-38.94) 4(-38.835,16.06) 4(61.165,-38.94) 4(61.165,16.06)

## Via types
v1: diameter 0.6, hole 0.3, Top Layer to Bottom Layer, tented both sides, 1810 vias

## Nets (pads, with @x,y where several pads share a name; then routed paths per layer and width w, separated by ;. In a path a pad name is that pad's centre, name@x,y a point inside that pad or via, vN(x,y) a via of type N, cw(c..) or ccw(c..) an arc to the next point about the centre after c; other vN are vias at no path point)
5V_CHARGER: C9.1 C10.1 C11.1 C17A.1 C19A.2 C23A.1 DD2.8 L3A.2 R4A.1 R7.1 | length 10.5
  Top Layer w0.4: 5.74,-46.863 5.817,-46.787 R4A.1@5.817,-38.797 C19A.2@8.204,-38.797
12V_EXT: C16A.1 C16B.1 C20A.1 C20B.1 C21A.1 C21B.1 D1A.1 D1B.1 FP11.1 | length 44.6
  Top Layer w2: C16A.1@-27.762,-28.201 -30.861,-25.103 -30.861,-14.466 FP11.1@-24.835,-8.44 -31.598,-1.677 -31.598,5.436 -30.259,6.774 C20B.1@-27.762,6.774
+4V2_BAT: BT1.1+ BT1.2+ BT2.1+ BT2.2+ C14.1 FP10.1 L2.2 R9.1 R11.2 R13.2 R14.1 VT1.5 VT1.6 VT1.7 VT1.8 VT3.1 | length 53
  Top Layer w0.2: R14.1@29.983,-25.984 33.122,-25.984 ; v1(75.006,-28.905) 78.009,-28.905 78.06,-28.956
  Top Layer w1: v1(39.929,-33.477) 76.429,-33.477 78.06,-31.846 78.06,-28.956 R11.2@78.06,-26.004
  Bottom Layer w0.2: v1(72.832,-28.905) v1(75.006,-28.905)
  other v1: 37.643,-35.585 38.405,-35.585 39.167,-35.585 39.929,-35.585 37.643,-34.874 38.405,-34.874 39.167,-34.874 39.929,-34.874 37.643,-34.188 38.405,-34.188 39.167,-34.188 39.929,-34.188 37.643,-33.477 38.405,-33.477 39.167,-33.477
BGND: BT1.1- BT1.2- BT2.1- BT2.2- C7.1 C15.1 FP2.1 Q1.2 Q1.3 Q2.2 Q2.3 Q3.2 Q3.3 Q4.2 Q4.3 VT3.3 | length 59.6
  Bottom Layer w2: BT1.1-@53.615,-42.09 BT1.2-@53.615,-22.79 BT2.1-@53.615,-1.77 BT2.2-@53.615,17.53